# Altium PCB PCB-00001-A-01.PcbDoc (part 2 of 3)
Units mm, origin at the board's own origin, x right, y up, seen from the top; angles counter-clockwise.
Board outline 139.7 x 78.23 mm, 4 copper layers (Top Layer, GND, PWR, Bottom Layer), stack 1.58 mm thick; 84 components, 52 nets, 278 pads, 148 vias.
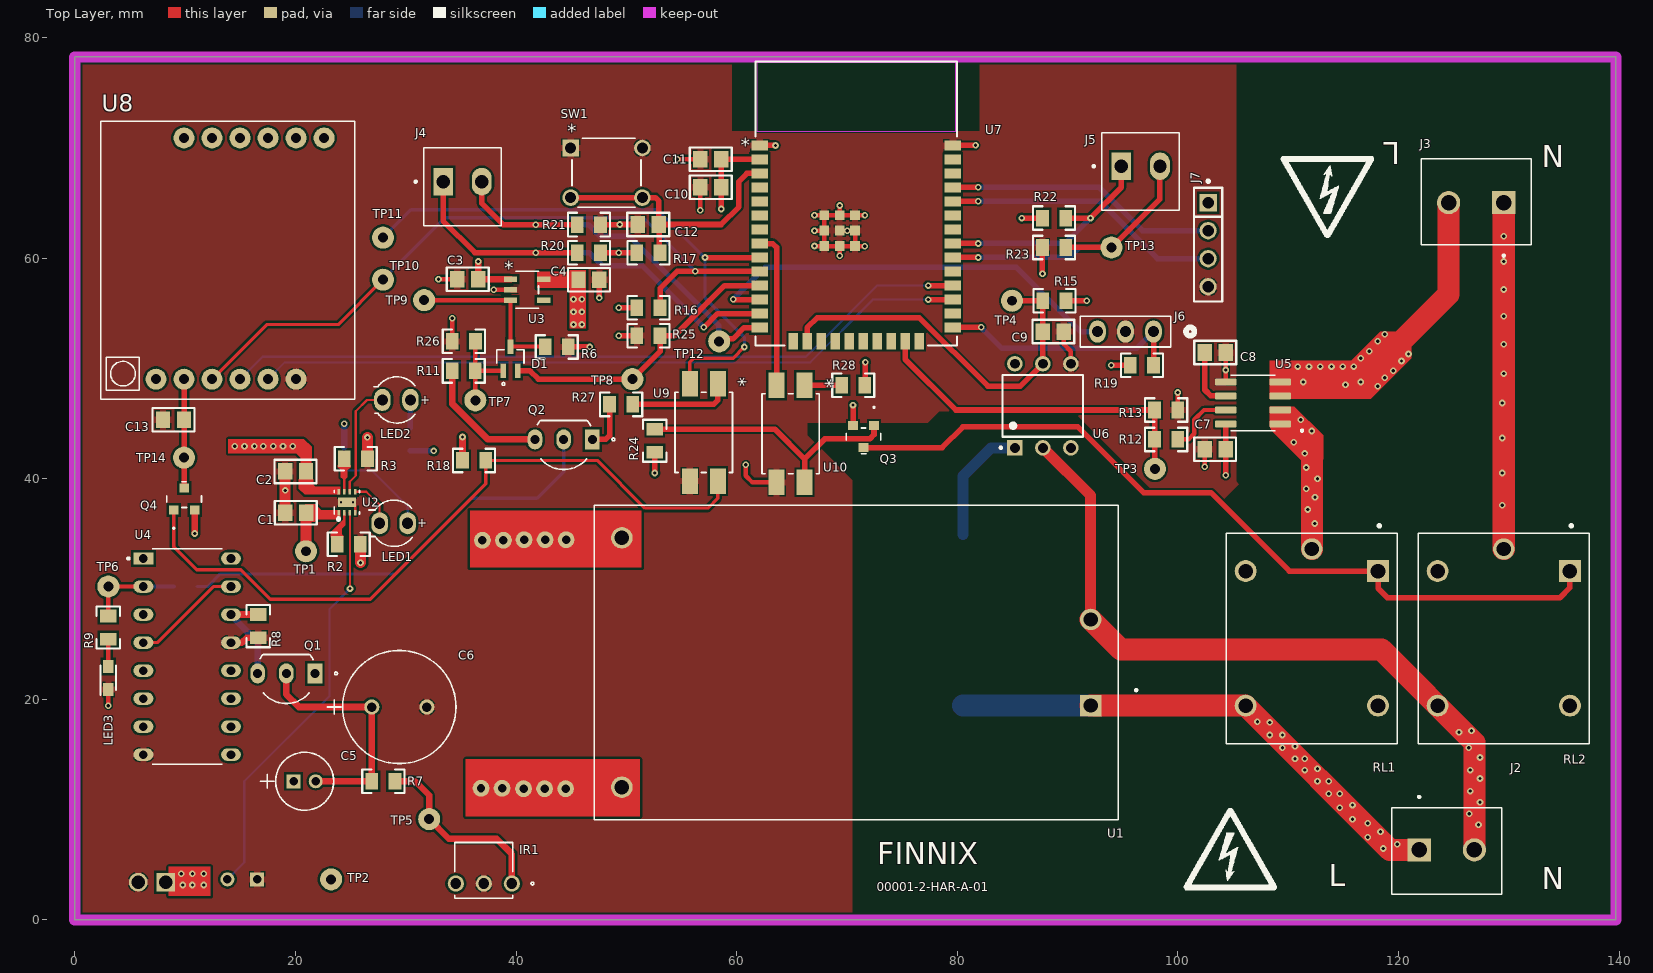
[diagram p0: Top Layer view]

## Via types
v1: diameter 0.6, hole 0.3, Top Layer to Bottom Layer, 140 vias
v2: diameter 0.6, hole 0.3, Top Layer to Bottom Layer, tented top, 7 vias
v3: diameter 0.6, hole 0.3, Top Layer to Bottom Layer, tented both sides, 1 vias

## Nets (pads, with @x,y where several pads share a name; then routed paths per layer and width w, separated by ;. In a path a pad name is that pad's centre, name@x,y a point inside that pad or via, vN(x,y) a via of type N, cw(c..) or ccw(c..) an arc to the next point about the centre after c; other vN are vias at no path point) (continued)
DGND: C1.2 C2.2 C3.2 C4.2 C6.2 C7.2 C8.2 C9.2 C10.2 C11.2 C12.2 C13.2 IR1.2 J1.2 J6.2 J7.4 LED3.1 pad.2@36.83,11.938 pad.2@40.685,11.904 pad.3@38.735,11.938 pad.3@42.59,11.904 pad.4@44.495,11.904 R1.1 R2.1 R3.1 R6.2 R8.1 R13.1 R21.1 R23.1 R25.1 R26.1 RL1.A2 RL2.A2 SW1.1 SW1.2 U1.3 U2.4 U2.9 U3.2 U4.8 U4.13 U5.5 U6.4 U7.1 U7.38 U7.39 U7.40 U7.41 U7.42 U7.43 U7.44 U7.45 U7.46 U7.47 U8.6 U9.3 U10.3 | length 66.9
  Top Layer w0.2: U2.9@25.226,37.866 25.226,37.785 25.426,37.585 U2.4@25.426,36.916
  Top Layer w0.4: v1(3.048,19.431) LED3.1@3.048,20.887 ; v1(32.976,58.083) C3.2@34.676,58.083 ; R26.1@34.222,52.451 v1(34.222,54.551) ; v1(37.982,57.141) 39.491,57.141 U3.2@39.499,57.133 ; v3(54.615,68.961) C11.2@56.708,68.961 ; v1(56.708,64.328) C10.2@56.708,66.421 ; v1(60.833,41.275) 60.833,40.259 61.43,39.662 U10.3@63.627,39.662 ; v1@67.059,61.087 U7.42@67.94,61.087 ; v1@67.059,62.487 U7.41@67.94,62.487 ; v1@67.059,63.886 U7.40@67.94,63.886 ; v1@69.339,60.206 U7.43@69.339,61.087 ; U7.39@69.339,62.487 69.341,62.488 70.018,62.488 v1(70.019,62.49) v1(70.019,62.49) 70.737,62.488 U7.45@70.739,62.487 U7.44@70.739,61.087 ; v1(69.342,64.77) 69.339,64.767 U7.47@69.339,63.886 ; v1@71.62,61.087 U7.44@70.739,61.087 ; v1(71.628,63.881) 71.623,63.886 U7.46@70.739,63.886 U7.47@69.339,63.886 ; C9.2@89.657,53.34 89.657,52.202 90.297,51.562 U6.4@90.297,50.419 ; R13.1@99.983,46.228 v1(99.983,47.818) ; v1(102.428,41.082) C7.2@102.428,42.672 ; U5.5@104.332,48.768 v1(104.332,49.849) C8.2@104.332,51.439 ; U7.42@67.94,61.087 U7.43@69.339,61.087 ; U7.42@67.94,61.087 U7.41@67.94,62.487 ; U7.41@67.94,62.487 U7.40@67.94,63.886 ; U7.40@67.94,63.886 U7.47@69.339,63.886 ; U7.43@69.339,61.087 U7.44@70.739,61.087
  Top Layer w0.5: R6.2@44.738,51.943 v1@46.685,51.943 ; v1(47.559,56.388) C4.2@47.559,58.039 ; R21.1@47.656,63.034 v1@49.307,63.034 ; v1(49.304,52.968) R25.1@50.955,52.968 ; v1(49.391,63.043) C12.2@51.042,63.043 ; U7.1@62.09,70.208 v1(63.523,70.208) ; U7.38@79.591,70.208 81.638,70.208 v1(81.661,70.231) ; v1(87.723,58.581) R23.1@87.723,60.96
  Top Layer w0.6: U4.13@14.144,25.146 U4.13@14.163,25.146 15.147,25.146 15.587,25.586 R8.1@16.637,25.586
  Top Layer w1: C1.2@19.079,36.916 C2.2@19.079,40.66 ; R2.1@25.895,34.056 25.908,34.043 v2(25.908,32.385) ; R3.1@26.53,41.803 v1(26.53,43.742)
  other v1: 19.079,38.936 46.685,51.946 69.337,60.203 67.056,61.09 71.623,61.084 67.056,62.489 67.056,63.889
ESP_RX0: J7.3 U7.34 | length 25.3
  Top Layer w0.5: U7.34@79.591,65.128 79.602,65.14 81.904,65.14 v1(81.915,65.151)
  Bottom Layer w0.5: v1(81.915,65.151) 92.929,65.151 98.136,59.944 J7.3@102.743,59.944
ESP_RX2_SIM: U7.27 U8.5 | length 65.1
  Top Layer w0.5: v1(77.366,56.238) U7.27@79.591,56.238
  Bottom Layer w0.2: U8.5@17.526,49.022 19.05,50.546 66.675,50.546 72.367,56.238 v1(77.366,56.238)
ESP_TX0: J7.2 U7.35 | length 24.8
  Top Layer w0.5: U7.35@79.591,66.398 81.892,66.398 v1(81.915,66.421)
  Bottom Layer w0.5: v1(81.915,66.421) 92.837,66.421 96.774,62.484 J7.2@102.743,62.484
ESP_TX2_SIM: U7.28 U8.4 | length 68.1
  Top Layer w0.5: v1(77.366,57.508) U7.28@79.591,57.508
  Bottom Layer w0.2: U8.4@14.986,49.022 17.018,51.054 66.294,51.054 72.748,57.508 v1(77.366,57.508)
I_SIG: R12.2 R13.2 TP3. U7.23 | length 31.5
  Top Layer w0.5: U7.23@75.286,52.447 75.286,50.825 79.883,46.228 R13.2@97.883,46.228 R12.2@97.883,43.561 97.9,43.544 97.9,40.911 TP3.@97.917,40.894
LATCH_IN: U7.8 U10.2 | length 14.2
  Top Layer w0.5: U7.8@62.09,61.318 63.269,61.318 63.627,60.96 U10.2@63.627,48.476
LATCH_IN1: Q3.1 R24.1 U10.4 | length 24.8
  Top Layer w0.5: R24.1@52.578,44.484 63.466,44.484 66.167,41.783 ; U10.4@66.167,39.662 66.167,41.783 ; Q3.1@72.451,44.815 72.451,44.003 72.069,43.621 68.005,43.621 66.167,41.783